# EAGLE board SNES_Basic (EAGLE 6.5.0)
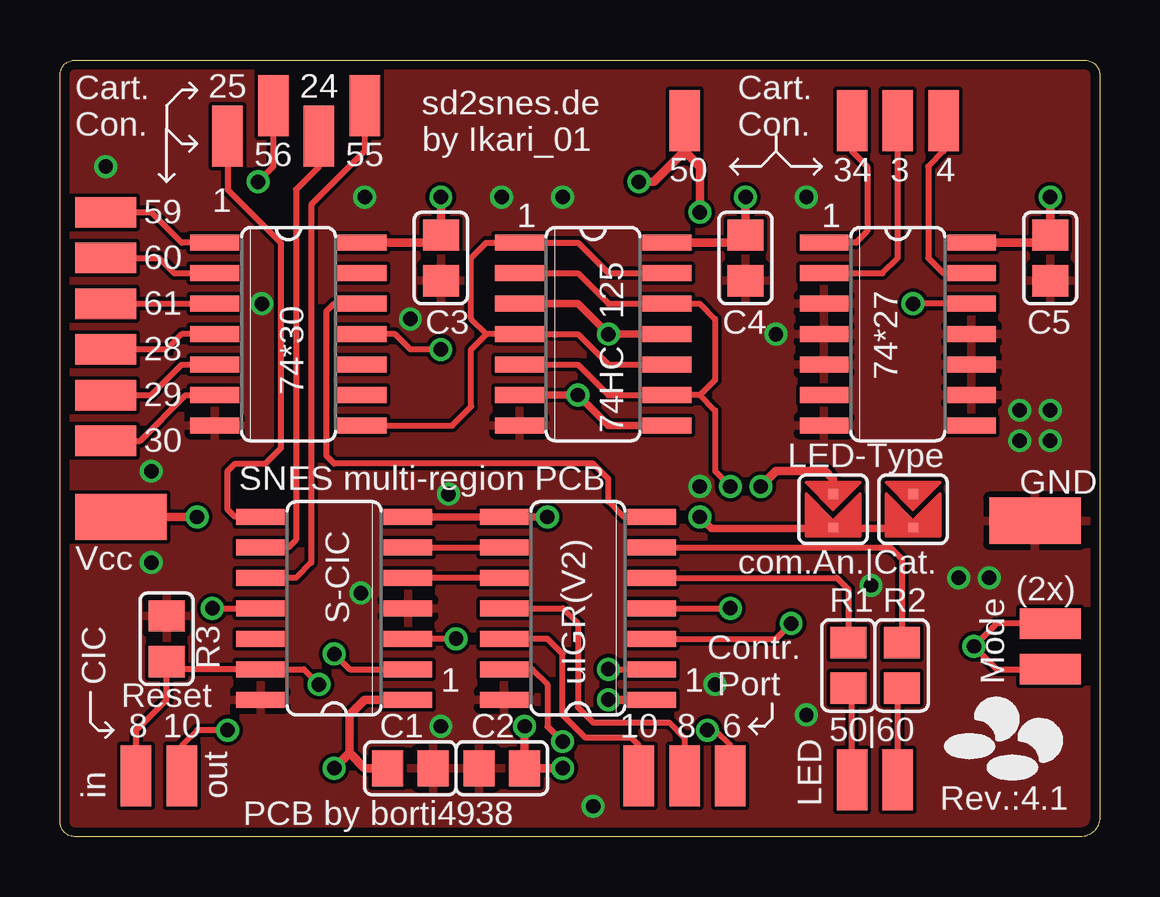
[diagram p0: board, top side]
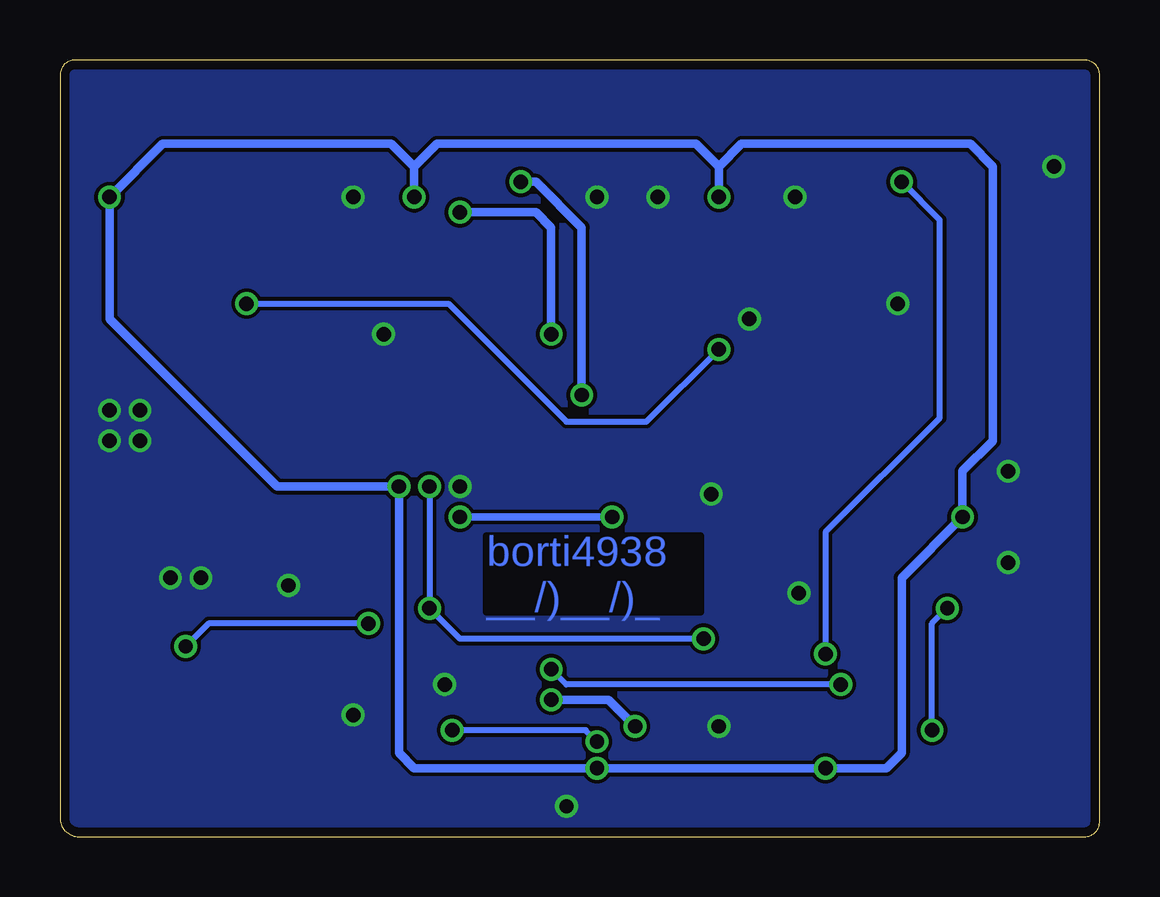
[diagram p1: board, bottom side, seen from below]

Size 43.34 x 32.38 mm. Coordinates in mm from the lower left corner, seen from the top.
Outline: 0.64,32.38 42.7,32.38 arc-90 43.34,31.75 43.34,0.79 arc-90 42.55,0 0.64,0 arc-90 0,0.64 0,31.75 arc-90 0.64,32.38
Copper layers (1*16): Top 0.0356mm / dielectric 1.5011mm / Bottom 0.0356mm
Design rules "LaenPCBOrder": minimum track width 6mil, minimum drill 13mil, track to track 6mil, track to pad 6mil, pad to pad 6mil, via to via 6mil, smd to smd 6mil, copper to edge 15mil, drill to drill 6mil, minimum pad ring 7mil, minimum via ring 7mil, stop-mask expansion 3mil, vias tented up to drill 0mil, thermal gap 10mil

## Footprints (pad centres in the part's own frame; a part is rotated, then mirrored left to right if it is on the bottom)
SO14 = smd 0.66 x 2.032: 1 -3.81,-3.073; 2 -2.54,-3.073; 3 -1.27,-3.073; 4 0,-3.073; 5 1.27,-3.073; 6 2.54,-3.073; 7 3.81,-3.073; 8 3.81,3.073; 9 2.54,3.073; 10 1.27,3.073; 11 0,3.073; 12 -1.27,3.073; 13 -2.54,3.073; 14 -3.81,3.073
Z0805 = smd 1.3 x 1.5: 1 -0.95,0; 2 0.95,0
SMD1,27-2,54 = smd 1.27 x 2.54: 1 0,0
PADS = smd 1.93 x 3.81: P$1 0,0
PIC16F630 = smd 0.66 x 2.032: 1 -3.81,-3.073; 2 -2.54,-3.073; 3 -1.27,-3.073; 4 0,-3.073; 5 1.27,-3.073; 6 2.54,-3.073; 7 3.81,-3.073; 8 3.81,3.073; 9 2.54,3.073; 10 1.27,3.073; 11 0,3.073; 12 -1.27,3.073; 13 -2.54,3.073; 14 -3.81,3.073
MYJUMP = smd 0.406 x 0.406: P$1 -0.635,0; P$2 0.765,0

## Placement (x,y rotation side)
74HC(T)125  [SO14]  22.22,20.95 270 top
C1  C100n  [Z0805]  18.41,2.86 180 top
C2  C100n  [Z0805]  14.61,2.86 0 top
C3  C100n  [Z0805]  28.57,24.13 270 top
C4  C100n  [Z0805]  15.88,24.13 270 top
C5  C100n  [Z0805]  41.27,24.13 270 top
CIC1  [SMD1,27-2,54]  12.7,30.48 0 top
CIC2  [SMD1,27-2,54]  10.79,29.21 0 top
CIC7  [SMD1,27-2,54]  8.89,30.48 0 top
CIC8  [SMD1,27-2,54]  3.17,2.54 0 top
CIC10  [SMD1,27-2,54]  5.08,2.54 180 top
CIC11  [SMD1,27-2,54]  6.99,29.21 0 top
CPP2  [SMD1,27-2,54]  26.04,2.54 0 top
CPP3  [SMD1,27-2,54]  24.13,2.54 0 top
CPP4  [SMD1,27-2,54]  27.94,2.54 0 top
D4  [SMD1,27-2,54]  26.04,29.84 0 top
IC1  74HC27D  [SO14]  34.92,20.95 270 top
IC2  74HCT30D  [SO14]  9.53,20.95 270 top
LED_NTSC  [SMD1,27-2,54]  34.92,2.38 0 top
LED_PAL  [SMD1,27-2,54]  33.02,2.38 180 top
MODE  [SMD1,27-2,54]  41.27,6.99 90 top
MODE1  [SMD1,27-2,54]  41.27,8.89 270 top
PAD13  [SMD1,27-2,54]  33.02,29.84 180 top
PAD14  [SMD1,27-2,54]  34.92,29.84 180 top
PAD15  [SMD1,27-2,54]  36.83,29.84 180 top
PAD16  [SMD1,27-2,54]  1.91,20.32 270 top
PAD17  [SMD1,27-2,54]  1.91,18.41 270 top
PAD18  [SMD1,27-2,54]  1.91,16.51 270 top
PAD19  [SMD1,27-2,54]  1.91,22.23 270 top
PAD20  [SMD1,27-2,54]  1.91,24.13 270 top
PAD21  [SMD1,27-2,54]  1.91,26.03 270 top
PAD_GND  [PADS]  40.64,13.18 270 top
PAD_VCC  [PADS]  2.54,13.33 270 top
R1  R10k  [Z0805]  4.44,8.26 270 top
R2  R220  [Z0805]  32.86,7.14 270 top
R3  R220  [Z0805]  35.08,7.14 270 top
U$2  PIC16F630_SIMPLE  [PIC16F630]  11.43,9.53 90 top
U$3  PIC16F630_SIMPLE  [PIC16F630]  21.59,9.53 90 top
U$4  MY_JUMPER  [MYJUMP]  32.23,13.65 270 top
U$5  MY_JUMPER  [MYJUMP]  35.56,13.65 270 top

## Library data of the parts
74HC(T)125 IC1 IC2 = 74xx-eu
C1-C5 PAD_GND PAD_VCC R1-R3 U$2-U$5 = snescart
CIC1 CIC2 CIC7 CIC8 CIC10 CIC11 CPP2-CPP4 D4 LED_NTSC LED_PAL MODE MODE1 PAD13-PAD21 = wirepad

## Nets
D4_ON/OFF: IC2.12 U$3.7
GND: 74HC(T)125.7 C1.2 C2.2 C3.2 C4.2 C5.2 IC1.3 IC1.4 IC1.5 IC1.7 IC1.9 IC1.10 IC1.11 IC2.7 PAD_GND.P$1 R1.1 U$2.4 U$2.14 U$3.14 U$5.P$1
N$1: LED_PAL.1 R2.2
N$2: 74HC(T)125.1 74HC(T)125.4 74HC(T)125.10 74HC(T)125.13 IC2.8
N$3: CIC10.1 U$2.11
N$4: IC2.5 PAD17.1
N$5: IC2.4 PAD16.1
N$6: IC2.3 PAD19.1
N$7: IC2.2 PAD20.1
N$8: IC2.1 PAD21.1
N$9: CIC7.1 U$2.2
N$10: CIC8.1 R1.2 U$2.13 U$3.2
N$11: IC1.1 PAD13.1
N$12: R2.1 U$3.5
N$13: R3.1 U$3.6
N$14: LED_NTSC.1 R3.2
N$15: IC2.6 PAD18.1
N$16: IC1.12 IC2.11
N$18: IC1.13 PAD15.1
N$19: U$2.5 U$3.10
N$22: IC1.2 PAD14.1
N$33: CPP2.1 U$3.11
N$34: CPP3.1 U$3.12
N$42: 74HC(T)125.3 74HC(T)125.6 74HC(T)125.8 74HC(T)125.11 D4.1
N$46: CPP4.1 U$3.13
N$48: CIC1.1 U$2.10
N$49: CIC2.1 U$2.9
N$51: CIC11.1 U$2.8
N$52: U$2.6 U$3.9
N$53: U$2.7 U$3.8 U$4.P$2 U$5.P$2
N$56: MODE1.1 MODE.1 U$3.3
UIGR: 74HC(T)125.2 74HC(T)125.5 74HC(T)125.9 74HC(T)125.12 U$2.3 U$3.4
VCC: 74HC(T)125.14 C1.1 C2.1 C3.1 C4.1 C5.1 IC1.14 IC2.14 PAD_VCC.P$1 U$2.1 U$3.1 U$4.P$1

## Tracks (layer width: path | path; a pad name or v marks a point on that pad's centre or on a via)
D4_ON/OFF
  Top 0.254: U$3.7 23.49,13.33 22.86,13.97 22.86,14.92 22.22,15.56 11.43,15.56 11.11,15.88 11.11,21.91 11.43,22.23 IC2.12
GND  (via drill 0.6)
  other vias: 41.27,16.51 38.73,10.79 29.84,20.95 31.12,26.67 20.95,26.67 12.7,26.67 16.19,14.29 22.22,1.27 3.81,15.24 31.12,5.08 3.81,11.43 14.61,21.59 26.67,14.6 27.3,6.35 15.88,4.6 1.91,27.94 37.46,10.79 40,16.51 33.81,10.48 18.41,26.67 40,17.78 41.27,17.78 12.54,10.16 8.41,22.23
  pour Bottom: -1.91,34.29 47.62,34.29 47.62,-5.08 -1.91,-5.08
  pour Top: -1.91,34.29 47.62,34.29 47.62,-5.08 -1.91,-5.08
N$1
  Top 0.254: 33.02,6.19 R2.2 33.02,6.04 LED_PAL.1
N$2
  Top 0.254: 74HC(T)125.13 22.86,23.49 21.59,24.77 74HC(T)125.1 17.78,24.77 17.14,24.13 17.14,21.59 17.78,20.95 | 74HC(T)125.10 22.86,19.69 21.59,20.95 74HC(T)125.4 17.78,20.95 | 17.78,20.95 17.14,20.32 17.14,17.94 16.35,17.15 IC2.8
N$3  (via drill 0.6)
  Top 0.254: v6.35,9.53 U$2.11 | v6.99,4.45 5.71,4.45 5.08,3.81 CIC10.1
  Bottom 0.254: v6.99,4.45 6.99,8.89 v6.35,9.53
N$4
  Top 0.254: PAD17.1 3.81,18.41 5.08,19.69 IC2.5
N$5
  Top 0.254: 3.17,20.32 PAD16.1 4.44,20.32 5.08,20.95 IC2.4
N$6
  Top 0.254: PAD19.1 IC2.3
N$7
  Top 0.254: PAD20.1 4.13,24.13 4.76,23.49 IC2.2
N$8
  Top 0.254: PAD21.1 3.81,26.03 5.08,24.77 IC2.1
N$9  (via drill 0.6)
  Top 0.254: v11.43,7.62 12.07,6.99 U$2.2 | CIC7.1 8.89,27.94 v8.26,27.3
  Bottom 0.254: v11.43,7.62 11.43,12.7 6.67,17.46 6.67,25.72 v8.26,27.3
N$10  (via drill 0.6)
  Top 0.254: CIC8.1 3.17,4.45 4.44,5.71 R1.2 4.76,6.99 U$2.13 10.16,6.99 v10.79,6.35 | v22.86,6.99 U$3.2
  Bottom 0.254: v10.79,6.35 22.22,6.35 v22.86,6.99
N$11
  Top 0.254: PAD13.1 33.02,28.57 33.66,27.94 33.66,25.24 33.18,24.77 IC1.1
N$12
  Top 0.254: U$3.5 32.38,10.79 32.86,10.32 R2.1
N$13
  Top 0.254: U$3.6 34.61,12.06 35.08,11.59 R3.1
N$14
  Top 0.254: 34.92,6.19 R3.2 34.92,6.04 LED_NTSC.1
N$15
  Top 0.254: PAD18.1 3.33,16.51 5.24,18.41 IC2.6
N$16  (via drill 0.6)
  Top 0.254: IC1.12 v35.56,22.23 | v15.88,20.32 14.61,20.32 13.97,20.95 IC2.11
  Bottom 0.254: v35.56,22.23 27.15,22.23 22.22,17.3 18.89,17.3 v15.88,20.32
N$18
  Top 0.254: PAD15.1 36.83,28.57 36.2,27.94 36.2,24.13 36.83,23.49 IC1.13
N$19
  Top 0.254: U$3.10 U$2.5
N$22
  Top 0.254: IC1.2 34.29,23.49 34.92,24.13 PAD14.1
N$33
  Top 0.254: U$3.11 20.95,9.53 21.59,8.89 21.59,5.4 22.22,4.76 25.4,4.76 26.04,4.13 CPP2.1
N$34
  Top 0.254: CPP3.1 24.13,3.81 23.81,4.13 21.91,4.13 20.95,5.08 20.95,7.62 20.32,8.26 U$3.12
N$42  (via drill 0.6)
  Top 0.305: 74HC(T)125.3 21.59,22.23 v22.86,20.95 74HC(T)125.11 | 74HC(T)125.6 v21.59,18.41 22.86,17.15 74HC(T)125.8
  Top 0.356: 26.04,28.57 D4.1 | v26.67,26.03 26.67,27.94 26.04,28.57 | v24.13,27.3 24.77,27.3 26.04,28.57
  Bottom 0.356: v21.59,18.41 21.59,25.4 23.49,27.3 v24.13,27.3 | v22.86,20.95 22.86,25.4 23.49,26.03 v26.67,26.03
N$46  (via drill 0.6)
  Top 0.254: U$3.13 19.68,6.99 20.32,6.35 20.32,4.6 v20.95,3.97 | v26.99,4.45 27.3,4.45 27.94,3.81 CPP4.1
  Bottom 0.254: v20.95,3.97 21.43,4.45 v26.99,4.45
N$48
  Top 0.254: CIC1.1 12.7,28.57 10.48,26.35 10.48,11.43 9.84,10.79 U$2.10
N$49
  Top 0.254: CIC2.1 10.79,27.94 9.84,26.99 9.84,12.38 9.53,12.06 U$2.9
N$51
  Top 0.254: U$2.8 7.3,13.33 6.99,13.65 6.99,15.24 7.3,15.56 8.57,15.56 9.21,16.19 9.21,24.77 6.99,26.99 CIC11.1
N$52
  Top 0.254: U$2.6 U$3.9
N$53  (via drill 0.6)
  Top 0.305: U$2.7 U$3.8 v20.32,13.33 | v26.67,13.33 27.15,12.86 31.43,12.86 | 31.43,12.86 35.53,12.86 U$5.P$2 | U$4.P$2 31.43,12.86
  Bottom 0.305: v20.32,13.33 v26.67,13.33
N$56  (via drill 0.6)
  Top 0.254: U$3.3 29.84,8.26 v30.48,8.89 | MODE.1 39.05,6.99 v38.1,7.94 39.05,8.89 MODE1.1
  Bottom 0.254: v30.48,8.89 37.15,8.89 v38.1,7.94
UIGR  (via drill 0.6)
  Top 0.254: 74HC(T)125.5 21.59,19.69 22.86,18.41 74HC(T)125.9 26.67,18.41 | 74HC(T)125.2 21.59,23.49 22.86,22.23 74HC(T)125.12 26.67,22.23 27.3,21.59 27.3,19.05 26.67,18.41 | 26.67,18.41 27.3,17.78 27.3,15.24 v27.94,14.6 | v16.51,8.26 U$2.3 | U$3.4 v27.94,9.53
  Bottom 0.254: v27.94,14.6 v27.94,9.53 26.67,8.26 v16.51,8.26
VCC  (via drill 0.6)
  Top 0.356: v28.57,26.67 C3.1 28.26,24.77 74HC(T)125.14 | v22.86,5.71 U$3.1 | v41.27,26.67 C5.1 40.96,24.77 IC1.14 | U$2.1 12.7,5.71 12.07,5.08 12.07,3.49 | 12.07,3.49 12.7,2.86 C2.1 | PAD_VCC.P$1 v5.71,13.33 | v11.43,2.86 12.07,3.49 | v19.37,4.6 C1.1 | C1.1 | C1.1 v20.95,2.86 | C4.1 16.19,25.08 | 15.56,25.4 C4.1 | v15.88,26.67 C4.1 | v29.21,14.6 29.84,15.24 31.91,15.24 32.23,14.92 U$4.P$1 | IC2.14 15.56,24.77 C4.1
  Bottom 0.356: v15.88,26.67 15.88,27.94 | v22.86,5.71 20.48,5.71 v19.37,4.6 | 15.88,27.94 14.92,28.89 5.4,28.89 4.44,27.94 4.44,16.51 5.71,15.24 v5.71,13.33 8.26,10.79 8.26,3.49 8.89,2.86 v11.43,2.86 v20.95,2.86 28.57,2.86 29.21,3.49 v29.21,14.6 34.29,14.6 41.27,21.59 v41.27,26.67 39.05,28.89 29.53,28.89 28.57,27.94 | 15.88,27.94 16.83,28.89 27.62,28.89 28.57,27.94 | 28.57,27.94 v28.57,26.67 28.57,26.35

## Text on the board
Bottom: borti4938 / __/)__/)_
tNames: 25 | 24 | Cart. / Con. | Cart. / Con. | sd2snes.de / by Ikari_01 | 56 | 55 | 50 | 34 | 3 | 4 | 59 | 1 | 1 | 1 | 60 | 61 | 125 | C3 | C4 | C5 | 28 | 74*30 | 74*27 | 29 | 74HC | 30 | LED-Type | SNES multi-region PCB | GND | Vcc | com.An.|Cat. | R1 | R2 | (2x) | S-CIC | CIC | R3 | uIGR(V2) | Mode | Reset | 1 | 1 | Contr. / Port | 8 | 10 | C1 | C2 | 10 | 8 | 6 | 50|60 | in | out | LED | PCB by borti4938 | Rev.:4.1